# Altium PCB 多通道.PcbDoc (part 4 of 4)
Units mm, origin at the board's own origin, x right, y up, seen from the top; angles counter-clockwise.
Board outline 145 x 32 mm, 2 copper layers (Top Layer, Bottom Layer); 175 components, 157 nets, 554 pads, 195 vias.
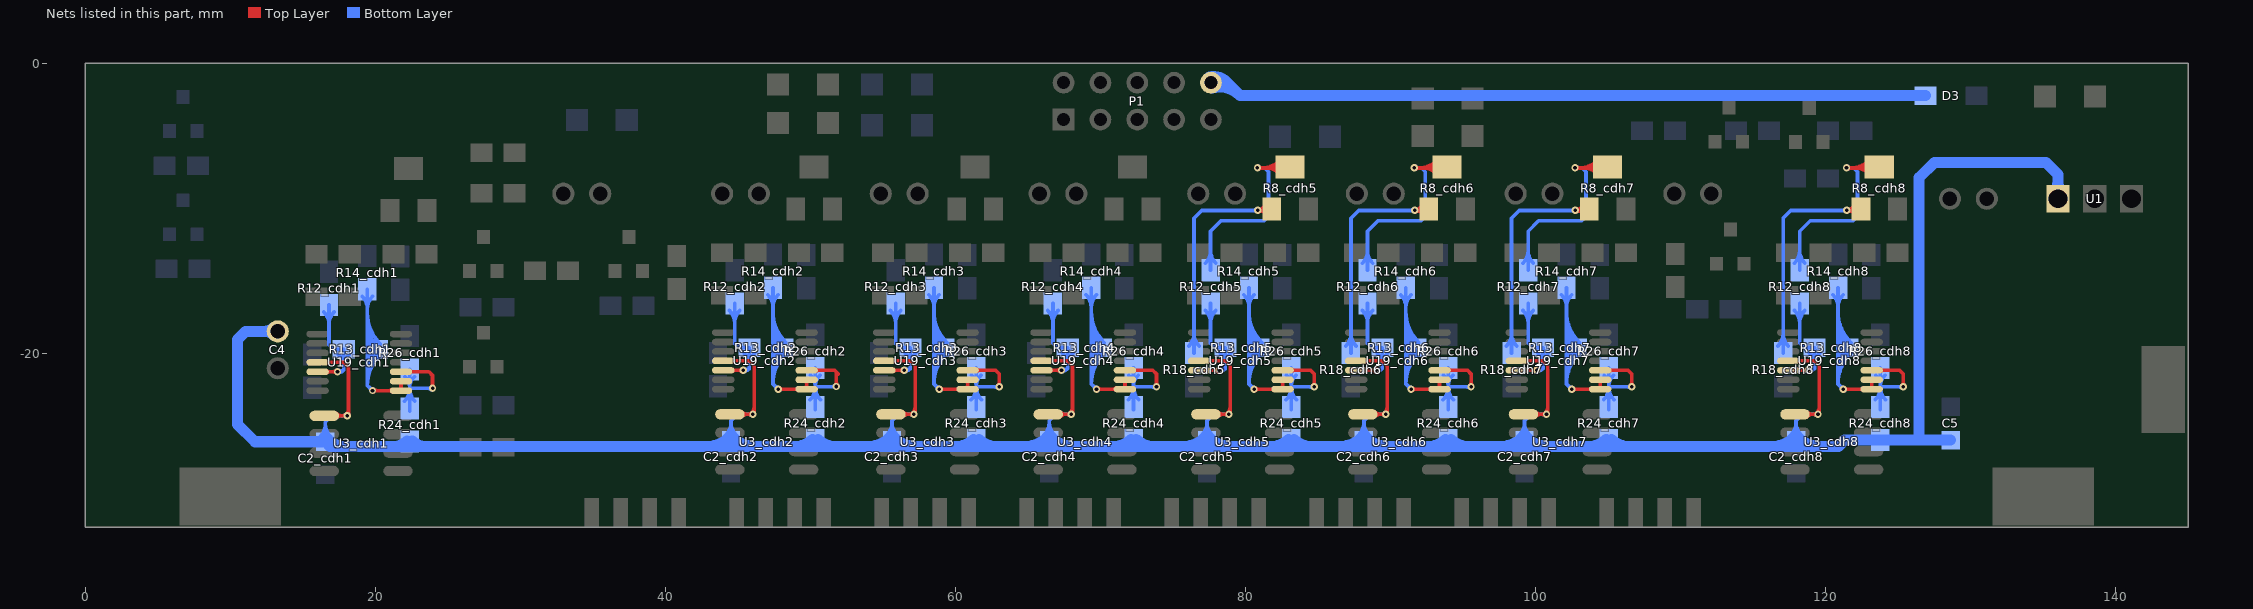
[diagram p4: the nets of this part, all layers, seen from the top]

## Via types
v1: diameter 0.5, hole 0.25, Top Layer to Bottom Layer, 192 vias
v2: diameter 3.1, hole 3.1, Top Layer to Bottom Layer, 3 vias

## Nets (pads, with @x,y where several pads share a name; then routed paths per layer and width w, separated by ;. In a path a pad name is that pad's centre, name@x,y a point inside that pad or via, vN(x,y) a via of type N, cw(c..) or ccw(c..) an arc to the next point about the centre after c; other vN are vias at no path point) (continued)
NetR8_cdh5_2: R8_cdh5.2 R18_cdh5.2 | length 19.2
  Top Layer w0.254: v1@80.903,-10.241 cw(c81.062,-10.515) 81.144,-10.209 ; v1@80.903,-10.028 ccw(c81.042,-9.788) 81.114,-10.056 ; v1@80.929,-10.222 cw(c81.153,-10.446) 81.153,-10.129 ; v1@80.929,-10.048 ccw(c81.124,-9.852) 81.124,-10.129 ; v1@80.948,-10.073 ccw(c81.188,-9.935) 81.117,-10.202 ; v1@80.949,-10.194 cw(c81.21,-10.338) 81.133,-10.051 ; R8_cdh5.2@81.252,-10.078 81.202,-10.129 v1@80.842,-10.129 ; R8_cdh5.2@81.342,-9.824 cw(c80.842,-9.566) v1@80.842,-10.129 ; R8_cdh5.2@81.402,-10.394 ccw(c80.842,-10.853) v1@80.842,-10.129
  Bottom Layer w0.254: R18_cdh5.2@76.088,-19.504 ccw(c75.221,-18.636) 76.448,-18.636 ccw(c77.674,-18.636) R18_cdh5.2@76.807,-19.504 ; R18_cdh5.2@76.448,-19.99 76.448,-10.693 76.981,-10.16 80.816,-10.16 v1(80.842,-10.135) ; 80.484,-10.16 ccw(c80.484,-9.776) v1@80.755,-10.048
NetR8_cdh5_3: R8_cdh5.3 R12_cdh5.1 | length 19.8
  Top Layer w0.254: v1@80.816,-7.229 82.472,-7.229 R8_cdh5.3@82.522,-7.178 ; v1@80.903,-7.301 cw(c81.077,-7.474) 81.077,-7.229 ; v1@80.903,-7.127 ccw(c81.15,-6.88) 81.15,-7.229 ; 81.093,-7.229 ccw(c81.093,-5.379) R8_cdh5.3@82.401,-6.687 ; 81.411,-7.229 cw(c81.411,-8.629) R8_cdh5.3@82.401,-7.639 ; 81.707,-7.229 ccw(c81.707,-5.992) R8_cdh5.3@82.581,-6.867 ; 82.024,-7.229 cw(c82.024,-8.015) R8_cdh5.3@82.581,-7.459
  Bottom Layer w0.254: R12_cdh5.1@77.231,-13.789 ccw(c76.364,-12.921) 77.591,-12.921 ccw(c78.817,-12.921) R12_cdh5.1@77.95,-13.789 ; R12_cdh5.1@77.591,-14.275 77.591,-11.582 78.312,-10.861 81.284,-10.861 81.578,-10.566 81.578,-7.493 81.299,-7.214 v1(80.816,-7.214) ; v1@80.903,-7.301 cw(c81.113,-7.511) 81.113,-7.214 cw(c81.113,-6.917) v1@80.903,-7.127
NetR8_cdh6_2: R8_cdh6.2 R18_cdh6.2 | length 19.2
  Top Layer w0.254: v1@91.724,-10.241 cw(c91.882,-10.515) 91.964,-10.209 ; v1@91.724,-10.028 ccw(c91.862,-9.788) 91.934,-10.056 ; v1@91.749,-10.222 cw(c91.974,-10.446) 91.974,-10.129 ; v1@91.749,-10.048 ccw(c91.945,-9.852) 91.945,-10.129 ; v1@91.769,-10.073 ccw(c92.009,-9.935) 91.937,-10.202 ; v1@91.77,-10.194 cw(c92.03,-10.338) 91.953,-10.051 ; R8_cdh6.2@92.073,-10.078 92.022,-10.129 v1@91.662,-10.129 ; R8_cdh6.2@92.162,-9.824 cw(c91.662,-9.566) v1@91.662,-10.129 ; R8_cdh6.2@92.223,-10.394 ccw(c91.662,-10.853) v1@91.662,-10.129
  Bottom Layer w0.254: R18_cdh6.2@86.909,-19.504 ccw(c86.042,-18.636) 87.268,-18.636 ccw(c88.494,-18.636) R18_cdh6.2@87.627,-19.504 ; R18_cdh6.2@87.268,-19.99 87.268,-10.693 87.801,-10.16 91.637,-10.16 v1(91.662,-10.135) ; 91.304,-10.16 ccw(c91.304,-9.776) v1@91.575,-10.048
NetR8_cdh6_3: R8_cdh6.3 R12_cdh6.1 | length 19.8
  Top Layer w0.254: v1@91.637,-7.229 93.292,-7.229 R8_cdh6.3@93.343,-7.178 ; v1@91.724,-7.301 cw(c91.898,-7.474) 91.898,-7.229 ; v1@91.724,-7.127 ccw(c91.97,-6.88) 91.97,-7.229 ; 91.914,-7.229 ccw(c91.914,-5.379) R8_cdh6.3@93.222,-6.687 ; 92.231,-7.229 cw(c92.231,-8.629) R8_cdh6.3@93.222,-7.639 ; 92.527,-7.229 ccw(c92.527,-5.992) R8_cdh6.3@93.401,-6.867 ; 92.845,-7.229 cw(c92.845,-8.015) R8_cdh6.3@93.401,-7.459
  Bottom Layer w0.254: R12_cdh6.1@88.052,-13.789 ccw(c87.185,-12.921) 88.411,-12.921 ccw(c89.637,-12.921) R12_cdh6.1@88.77,-13.789 ; R12_cdh6.1@88.411,-14.275 88.411,-11.582 89.133,-10.861 92.104,-10.861 92.399,-10.566 92.399,-7.493 92.119,-7.214 v1(91.637,-7.214) ; v1@91.724,-7.301 cw(c91.934,-7.511) 91.934,-7.214 cw(c91.934,-6.917) v1@91.724,-7.127
NetR8_cdh7_2: R8_cdh7.2 R18_cdh7.2 | length 19.2
  Top Layer w0.254: v1@102.798,-10.241 cw(c102.956,-10.515) 103.038,-10.209 ; v1@102.798,-10.028 ccw(c102.937,-9.788) 103.008,-10.056 ; v1@102.824,-10.222 cw(c103.048,-10.446) 103.048,-10.129 ; v1@102.824,-10.048 ccw(c103.019,-9.852) 103.019,-10.129 ; v1@102.843,-10.073 ccw(c103.083,-9.935) 103.011,-10.202 ; v1@102.844,-10.194 cw(c103.104,-10.338) 103.028,-10.051 ; R8_cdh7.2@103.147,-10.078 103.096,-10.129 v1@102.737,-10.129 ; R8_cdh7.2@103.237,-9.824 cw(c102.737,-9.566) v1@102.737,-10.129 ; R8_cdh7.2@103.297,-10.394 ccw(c102.737,-10.853) v1@102.737,-10.129
  Bottom Layer w0.254: R18_cdh7.2@97.983,-19.504 ccw(c97.116,-18.636) 98.342,-18.636 ccw(c99.569,-18.636) R18_cdh7.2@98.702,-19.504 ; R18_cdh7.2@98.342,-19.99 98.342,-10.693 98.876,-10.16 102.711,-10.16 v1(102.737,-10.135) ; 102.378,-10.16 ccw(c102.378,-9.776) v1@102.65,-10.048
NetR8_cdh7_3: R8_cdh7.3 R12_cdh7.1 | length 19.8
  Top Layer w0.254: v1@102.711,-7.229 104.366,-7.229 R8_cdh7.3@104.417,-7.178 ; v1@102.798,-7.301 cw(c102.972,-7.474) 102.972,-7.229 ; v1@102.798,-7.127 ccw(c103.044,-6.88) 103.044,-7.229 ; 102.988,-7.229 ccw(c102.988,-5.379) R8_cdh7.3@104.296,-6.687 ; 103.306,-7.229 cw(c103.306,-8.629) R8_cdh7.3@104.296,-7.639 ; 103.601,-7.229 ccw(c103.601,-5.992) R8_cdh7.3@104.476,-6.867 ; 103.919,-7.229 cw(c103.919,-8.015) R8_cdh7.3@104.476,-7.459
  Bottom Layer w0.254: R12_cdh7.1@99.126,-13.789 ccw(c98.259,-12.921) 99.485,-12.921 ccw(c100.712,-12.921) R12_cdh7.1@99.845,-13.789 ; R12_cdh7.1@99.485,-14.275 99.485,-11.582 100.207,-10.861 103.179,-10.861 103.473,-10.566 103.473,-7.493 103.194,-7.214 v1(102.711,-7.214) ; v1@102.798,-7.301 cw(c103.008,-7.511) 103.008,-7.214 cw(c103.008,-6.917) v1@102.798,-7.127
NetR8_cdh8_2: R8_cdh8.2 R18_cdh8.2 | length 19.2
  Top Layer w0.254: v1@121.518,-10.241 cw(c121.676,-10.515) 121.758,-10.209 ; v1@121.518,-10.028 ccw(c121.656,-9.788) 121.728,-10.056 ; v1@121.543,-10.222 cw(c121.768,-10.446) 121.768,-10.129 ; v1@121.543,-10.048 ccw(c121.739,-9.852) 121.739,-10.129 ; v1@121.563,-10.073 ccw(c121.803,-9.935) 121.731,-10.202 ; v1@121.564,-10.194 cw(c121.824,-10.338) 121.747,-10.051 ; R8_cdh8.2@121.867,-10.078 121.816,-10.129 v1@121.456,-10.129 ; R8_cdh8.2@121.957,-9.824 cw(c121.456,-9.566) v1@121.456,-10.129 ; R8_cdh8.2@122.017,-10.394 ccw(c121.456,-10.853) v1@121.456,-10.129
  Bottom Layer w0.254: R18_cdh8.2@116.703,-19.504 ccw(c115.836,-18.636) 117.062,-18.636 ccw(c118.289,-18.636) R18_cdh8.2@117.421,-19.504 ; R18_cdh8.2@117.062,-19.99 117.062,-10.693 117.596,-10.16 121.431,-10.16 v1(121.456,-10.135) ; 121.098,-10.16 ccw(c121.098,-9.776) v1@121.369,-10.048
NetR8_cdh8_3: R8_cdh8.3 R12_cdh8.1 | length 19.8
  Top Layer w0.254: v1@121.431,-7.229 123.086,-7.229 R8_cdh8.3@123.137,-7.178 ; v1@121.518,-7.301 cw(c121.692,-7.474) 121.692,-7.229 ; v1@121.518,-7.127 ccw(c121.764,-6.88) 121.764,-7.229 ; 121.708,-7.229 ccw(c121.708,-5.379) R8_cdh8.3@123.016,-6.687 ; 122.026,-7.229 cw(c122.026,-8.629) R8_cdh8.3@123.016,-7.639 ; 122.321,-7.229 ccw(c122.321,-5.992) R8_cdh8.3@123.195,-6.867 ; 122.639,-7.229 cw(c122.639,-8.015) R8_cdh8.3@123.195,-7.459
  Bottom Layer w0.254: R12_cdh8.1@117.846,-13.789 ccw(c116.979,-12.921) 118.205,-12.921 ccw(c119.432,-12.921) R12_cdh8.1@118.564,-13.789 ; R12_cdh8.1@118.205,-14.275 118.205,-11.582 118.927,-10.861 121.899,-10.861 122.193,-10.566 122.193,-7.493 121.914,-7.214 v1(121.431,-7.214) ; v1@121.518,-7.301 cw(c121.728,-7.511) 121.728,-7.214 cw(c121.728,-6.917) v1@121.518,-7.127
NetR12_cdh1_2: R12_cdh1.2 R13_cdh1.1 U19_cdh1.5 | length 12.7
  Top Layer w0.254: U19_cdh1.5@16.023,-21.275 v1(17.397,-21.275) ; U19_cdh1.5@16.642,-21.344 cw(c16.81,-21.511) 16.81,-21.275 cw(c16.81,-21.038) U19_cdh1.5@16.642,-21.206 ; v1@17.31,-21.362 ccw(c17.1,-21.572) 17.1,-21.275 ccw(c17.1,-20.978) v1@17.31,-21.188
  Bottom Layer w0.254: R12_cdh1.2@16.449,-17.149 cw(c15.582,-18.016) 16.808,-18.016 cw(c18.035,-18.016) R12_cdh1.2@17.168,-17.149 ; R12_cdh1.2@16.808,-16.662 16.808,-19.406 17.128,-19.725 R13_cdh1.1@17.829,-19.725 17.829,-21.148 ; v1(17.397,-21.275) 17.702,-21.275 17.829,-21.148 ; v1@17.469,-21.176 ccw(c17.633,-20.952) 17.829,-21.148 ; R13_cdh1.1@17.469,-20.085 cw(c16.602,-20.952) 17.829,-20.952 cw(c19.055,-20.952) R13_cdh1.1@18.188,-20.085 ; v1@17.484,-21.362 cw(c17.694,-21.572) 17.694,-21.275 cw(c17.694,-20.978) v1@17.484,-21.188
NetR12_cdh2_2: R12_cdh2.2 R13_cdh2.1 U19_cdh2.5 | length 12.7
  Top Layer w0.254: U19_cdh2.5@43.989,-21.173 v1(45.362,-21.173) ; U19_cdh2.5@44.608,-21.242 cw(c44.775,-21.41) 44.775,-21.173 cw(c44.775,-20.937) U19_cdh2.5@44.608,-21.104 ; v1@45.275,-21.26 ccw(c45.065,-21.47) 45.065,-21.173 ccw(c45.065,-20.876) v1@45.275,-21.086
  Bottom Layer w0.254: R12_cdh2.2@44.415,-17.047 cw(c43.547,-17.914) 44.774,-17.914 cw(c46,-17.914) R12_cdh2.2@45.133,-17.047 ; R12_cdh2.2@44.774,-16.561 44.774,-19.304 45.094,-19.624 R13_cdh2.1@45.794,-19.624 45.794,-21.046 ; v1(45.362,-21.173) 45.667,-21.173 45.794,-21.046 ; v1@45.435,-21.074 ccw(c45.598,-20.85) 45.794,-21.046 ; R13_cdh2.1@45.435,-19.983 cw(c44.568,-20.85) 45.794,-20.85 cw(c47.02,-20.85) R13_cdh2.1@46.153,-19.983 ; v1@45.449,-21.26 cw(c45.659,-21.47) 45.659,-21.173 cw(c45.659,-20.876) v1@45.449,-21.086
NetR12_cdh3_2: R12_cdh3.2 R13_cdh3.1 U19_cdh3.5 | length 12.7
  Top Layer w0.254: U19_cdh3.5@55.088,-21.173 v1(56.462,-21.173) ; U19_cdh3.5@55.708,-21.242 cw(c55.875,-21.41) 55.875,-21.173 cw(c55.875,-20.937) U19_cdh3.5@55.708,-21.104 ; v1@56.375,-21.26 ccw(c56.165,-21.47) 56.165,-21.173 ccw(c56.165,-20.876) v1@56.375,-21.086
  Bottom Layer w0.254: R12_cdh3.2@55.514,-17.047 cw(c54.647,-17.914) 55.874,-17.914 cw(c57.1,-17.914) R12_cdh3.2@56.233,-17.047 ; R12_cdh3.2@55.874,-16.561 55.874,-19.304 56.193,-19.624 R13_cdh3.1@56.894,-19.624 56.894,-21.046 ; v1(56.462,-21.173) 56.767,-21.173 56.894,-21.046 ; v1@56.535,-21.074 ccw(c56.698,-20.85) 56.894,-21.046 ; R13_cdh3.1@56.535,-19.983 cw(c55.667,-20.85) 56.894,-20.85 cw(c58.12,-20.85) R13_cdh3.1@57.253,-19.983 ; v1@56.549,-21.26 cw(c56.759,-21.47) 56.759,-21.173 cw(c56.759,-20.876) v1@56.549,-21.086
NetR12_cdh4_2: R12_cdh4.2 R13_cdh4.1 U19_cdh4.5 | length 12.7
  Top Layer w0.254: U19_cdh4.5@65.934,-21.173 v1(67.308,-21.173) ; U19_cdh4.5@66.553,-21.242 cw(c66.721,-21.41) 66.721,-21.173 cw(c66.721,-20.937) U19_cdh4.5@66.553,-21.104 ; v1@67.221,-21.26 ccw(c67.011,-21.47) 67.011,-21.173 ccw(c67.011,-20.876) v1@67.221,-21.086
  Bottom Layer w0.254: R12_cdh4.2@66.36,-17.047 cw(c65.493,-17.914) 66.719,-17.914 cw(c67.946,-17.914) R12_cdh4.2@67.079,-17.047 ; R12_cdh4.2@66.719,-16.561 66.719,-19.304 67.039,-19.624 R13_cdh4.1@67.74,-19.624 67.74,-21.046 ; v1(67.308,-21.173) 67.613,-21.173 67.74,-21.046 ; v1@67.38,-21.074 ccw(c67.544,-20.85) 67.74,-21.046 ; R13_cdh4.1@67.38,-19.983 cw(c66.513,-20.85) 67.74,-20.85 cw(c68.966,-20.85) R13_cdh4.1@68.099,-19.983 ; v1@67.395,-21.26 cw(c67.605,-21.47) 67.605,-21.173 cw(c67.605,-20.876) v1@67.395,-21.086
NetR12_cdh5_2: R12_cdh5.2 R13_cdh5.1 U19_cdh5.5 | length 12.7
  Top Layer w0.254: U19_cdh5.5@76.805,-21.173 v1(78.179,-21.173) ; U19_cdh5.5@77.425,-21.242 cw(c77.592,-21.41) 77.592,-21.173 cw(c77.592,-20.937) U19_cdh5.5@77.425,-21.104 ; v1@78.092,-21.26 ccw(c77.882,-21.47) 77.882,-21.173 ccw(c77.882,-20.876) v1@78.092,-21.086
  Bottom Layer w0.254: R12_cdh5.2@77.231,-17.047 cw(c76.364,-17.914) 77.591,-17.914 cw(c78.817,-17.914) R12_cdh5.2@77.95,-17.047 ; R12_cdh5.2@77.591,-16.561 77.591,-19.304 77.91,-19.624 R13_cdh5.1@78.611,-19.624 78.611,-21.046 ; v1(78.179,-21.173) 78.484,-21.173 78.611,-21.046 ; v1@78.252,-21.074 ccw(c78.415,-20.85) 78.611,-21.046 ; R13_cdh5.1@78.252,-19.983 cw(c77.384,-20.85) 78.611,-20.85 cw(c79.837,-20.85) R13_cdh5.1@78.97,-19.983 ; v1@78.266,-21.26 cw(c78.476,-21.47) 78.476,-21.173 cw(c78.476,-20.876) v1@78.266,-21.086
NetR12_cdh6_2: R12_cdh6.2 R13_cdh6.1 U19_cdh6.5 | length 12.7
  Top Layer w0.254: U19_cdh6.5@87.626,-21.173 v1(88.999,-21.173) ; U19_cdh6.5@88.245,-21.242 cw(c88.412,-21.41) 88.412,-21.173 cw(c88.412,-20.937) U19_cdh6.5@88.245,-21.104 ; v1@88.912,-21.26 ccw(c88.702,-21.47) 88.702,-21.173 ccw(c88.702,-20.876) v1@88.912,-21.086
  Bottom Layer w0.254: R12_cdh6.2@88.052,-17.047 cw(c87.185,-17.914) 88.411,-17.914 cw(c89.637,-17.914) R12_cdh6.2@88.77,-17.047 ; R12_cdh6.2@88.411,-16.561 88.411,-19.304 88.731,-19.624 R13_cdh6.1@89.431,-19.624 89.431,-21.046 ; v1(88.999,-21.173) 89.304,-21.173 89.431,-21.046 ; v1@89.072,-21.074 ccw(c89.235,-20.85) 89.431,-21.046 ; R13_cdh6.1@89.072,-19.983 cw(c88.205,-20.85) 89.431,-20.85 cw(c90.658,-20.85) R13_cdh6.1@89.79,-19.983 ; v1@89.086,-21.26 cw(c89.296,-21.47) 89.296,-21.173 cw(c89.296,-20.876) v1@89.086,-21.086
NetR12_cdh7_2: R12_cdh7.2 R13_cdh7.1 U19_cdh7.5 | length 12.7
  Top Layer w0.254: U19_cdh7.5@98.7,-21.173 v1(100.074,-21.173) ; U19_cdh7.5@99.319,-21.242 cw(c99.487,-21.41) 99.487,-21.173 cw(c99.487,-20.937) U19_cdh7.5@99.319,-21.104 ; v1@99.987,-21.26 ccw(c99.777,-21.47) 99.777,-21.173 ccw(c99.777,-20.876) v1@99.987,-21.086
  Bottom Layer w0.254: R12_cdh7.2@99.126,-17.047 cw(c98.259,-17.914) 99.485,-17.914 cw(c100.712,-17.914) R12_cdh7.2@99.845,-17.047 ; R12_cdh7.2@99.485,-16.561 99.485,-19.304 99.805,-19.624 R13_cdh7.1@100.506,-19.624 100.506,-21.046 ; v1(100.074,-21.173) 100.379,-21.173 100.506,-21.046 ; v1@100.146,-21.074 ccw(c100.31,-20.85) 100.506,-21.046 ; R13_cdh7.1@100.146,-19.983 cw(c99.279,-20.85) 100.506,-20.85 cw(c101.732,-20.85) R13_cdh7.1@100.865,-19.983 ; v1@100.161,-21.26 cw(c100.371,-21.47) 100.371,-21.173 cw(c100.371,-20.876) v1@100.161,-21.086
NetR12_cdh8_2: R12_cdh8.2 R13_cdh8.1 U19_cdh8.5 | length 12.7
  Top Layer w0.254: U19_cdh8.5@117.42,-21.173 v1(118.794,-21.173) ; U19_cdh8.5@118.039,-21.242 cw(c118.207,-21.41) 118.207,-21.173 cw(c118.207,-20.937) U19_cdh8.5@118.039,-21.104 ; v1@118.707,-21.26 ccw(c118.497,-21.47) 118.497,-21.173 ccw(c118.497,-20.876) v1@118.707,-21.086
  Bottom Layer w0.254: R12_cdh8.2@117.846,-17.047 cw(c116.979,-17.914) 118.205,-17.914 cw(c119.432,-17.914) R12_cdh8.2@118.564,-17.047 ; R12_cdh8.2@118.205,-16.561 118.205,-19.304 118.525,-19.624 R13_cdh8.1@119.225,-19.624 119.225,-21.046 ; v1(118.794,-21.173) 119.098,-21.173 119.225,-21.046 ; v1@118.866,-21.074 ccw(c119.03,-20.85) 119.225,-21.046 ; R13_cdh8.1@118.866,-19.983 cw(c117.999,-20.85) 119.225,-20.85 cw(c120.452,-20.85) R13_cdh8.1@119.585,-19.983 ; v1@118.881,-21.26 cw(c119.091,-21.47) 119.091,-21.173 cw(c119.091,-20.876) v1@118.881,-21.086
NetR13_cdh1_2: R13_cdh1.2 R14_cdh1.2 U19_cdh1.8 U19_cdh1.9 | length 27.2
  Top Layer w0.254: v1@19.784,-22.57 19.789,-22.575 v1(19.81,-22.575) U19_cdh1.8@21.773,-22.575 U19_cdh1.9@21.773,-21.925 21.773,-21.914 U19_cdh1.9@21.74,-21.881 ; v1@19.897,-22.662 cw(c20.107,-22.872) 20.107,-22.575 cw(c20.107,-22.278) v1@19.897,-22.488 ; U19_cdh1.8@21.154,-22.644 ccw(c20.987,-22.811) 20.987,-22.575 ccw(c20.987,-22.338) U19_cdh1.8@21.154,-22.506 ; U19_cdh1.8@21.704,-22.506 ccw(c21.537,-22.338) 21.773,-22.338 ccw(c22.01,-22.338) U19_cdh1.8@21.842,-22.506 ; U19_cdh1.9@21.704,-21.994 cw(c21.537,-22.161) 21.773,-22.161 cw(c22.01,-22.161) U19_cdh1.9@21.842,-21.994
  Bottom Layer w0.254: R14_cdh1.2@19.095,-16.071 cw(c18.228,-16.939) 19.454,-16.939 cw(c20.681,-16.939) R14_cdh1.2@19.813,-16.071 ; 19.454,-22.24 cw(c22.502,-22.24) R13_cdh1.2@20.347,-20.085 ; 19.454,-21.626 cw(c21.889,-21.626) R13_cdh1.2@20.167,-19.905 ; 19.454,-21.013 cw(c21.275,-21.013) 19.988,-19.725 cw(c21.275,-18.438) 19.454,-18.438 ; 19.454,-20.4 cw(c20.662,-20.4) R13_cdh1.2@19.808,-19.546 ; 19.454,-19.051 ccw(c20.662,-19.051) R13_cdh1.2@19.808,-19.905 ; 19.454,-17.824 ccw(c21.889,-17.824) R13_cdh1.2@20.167,-19.546 ; 19.454,-17.211 ccw(c22.502,-17.211) R13_cdh1.2@20.347,-19.366 ; R14_cdh1.2@19.454,-15.585 19.454,-19.725 19.454,-22.219 v1(19.81,-22.575) ; v1@19.687,-22.575 ccw(c19.39,-22.575) 19.6,-22.365 ccw(c19.81,-22.155) v1@19.81,-22.452
NetR13_cdh2_2: R13_cdh2.2 R14_cdh2.2 U19_cdh2.8 U19_cdh2.9 | length 27.2
  Top Layer w0.254: v1@47.75,-22.469 47.754,-22.473 v1(47.775,-22.473) U19_cdh2.8@49.739,-22.473 U19_cdh2.9@49.739,-21.823 49.739,-21.812 U19_cdh2.9@49.706,-21.779 ; v1@47.862,-22.56 cw(c48.072,-22.77) 48.072,-22.473 cw(c48.072,-22.176) v1@47.862,-22.386 ; U19_cdh2.8@49.119,-22.542 ccw(c48.952,-22.71) 48.952,-22.473 ccw(c48.952,-22.237) U19_cdh2.8@49.119,-22.404 ; U19_cdh2.8@49.669,-22.404 ccw(c49.502,-22.237) 49.739,-22.237 ccw(c49.975,-22.237) U19_cdh2.8@49.808,-22.404 ; U19_cdh2.9@49.669,-21.892 cw(c49.502,-22.06) 49.739,-22.06 cw(c49.975,-22.06) U19_cdh2.9@49.808,-21.892
  Bottom Layer w0.254: R14_cdh2.2@47.06,-15.97 cw(c46.193,-16.837) 47.42,-16.837 cw(c48.646,-16.837) R14_cdh2.2@47.779,-15.97 ; 47.42,-22.138 cw(c50.467,-22.138) R13_cdh2.2@48.312,-19.983 ; 47.42,-21.525 cw(c49.854,-21.525) R13_cdh2.2@48.133,-19.803 ; 47.42,-20.912 cw(c49.241,-20.912) 47.953,-19.624 cw(c49.241,-18.336) 47.42,-18.336 ; 47.42,-20.298 cw(c48.628,-20.298) R13_cdh2.2@47.773,-19.444 ; 47.42,-18.949 ccw(c48.628,-18.949) R13_cdh2.2@47.773,-19.803 ; 47.42,-17.723 ccw(c49.854,-17.723) R13_cdh2.2@48.133,-19.444 ; 47.42,-17.11 ccw(c50.467,-17.11) R13_cdh2.2@48.312,-19.265 ; R14_cdh2.2@47.42,-15.484 47.42,-19.624 47.42,-22.118 v1(47.775,-22.473) ; v1@47.652,-22.473 ccw(c47.355,-22.473) 47.565,-22.263 ccw(c47.775,-22.053) v1@47.775,-22.35
NetR13_cdh3_2: R13_cdh3.2 R14_cdh3.2 U19_cdh3.8 U19_cdh3.9 | length 27.2
  Top Layer w0.254: v1@58.85,-22.469 58.854,-22.473 v1(58.875,-22.473) U19_cdh3.8@60.838,-22.473 U19_cdh3.9@60.838,-21.823 60.838,-21.812 U19_cdh3.9@60.805,-21.779 ; v1@58.962,-22.56 cw(c59.172,-22.77) 59.172,-22.473 cw(c59.172,-22.176) v1@58.962,-22.386 ; U19_cdh3.8@60.219,-22.542 ccw(c60.052,-22.71) 60.052,-22.473 ccw(c60.052,-22.237) U19_cdh3.8@60.219,-22.404 ; U19_cdh3.8@60.769,-22.404 ccw(c60.602,-22.237) 60.838,-22.237 ccw(c61.075,-22.237) U19_cdh3.8@60.908,-22.404 ; U19_cdh3.9@60.769,-21.892 cw(c60.602,-22.06) 60.838,-22.06 cw(c61.075,-22.06) U19_cdh3.9@60.908,-21.892
  Bottom Layer w0.254: R14_cdh3.2@58.16,-15.97 cw(c57.293,-16.837) 58.519,-16.837 cw(c59.746,-16.837) R14_cdh3.2@58.879,-15.97 ; 58.519,-22.138 cw(c61.567,-22.138) R13_cdh3.2@59.412,-19.983 ; 58.519,-21.525 cw(c60.954,-21.525) R13_cdh3.2@59.232,-19.803 ; 58.519,-20.912 cw(c60.341,-20.912) 59.053,-19.624 cw(c60.341,-18.336) 58.519,-18.336 ; 58.519,-20.298 cw(c59.727,-20.298) R13_cdh3.2@58.873,-19.444 ; 58.519,-18.949 ccw(c59.727,-18.949) R13_cdh3.2@58.873,-19.803 ; 58.519,-17.723 ccw(c60.954,-17.723) R13_cdh3.2@59.232,-19.444 ; 58.519,-17.11 ccw(c61.567,-17.11) R13_cdh3.2@59.412,-19.265 ; R14_cdh3.2@58.519,-15.484 58.519,-19.624 58.519,-22.118 v1(58.875,-22.473) ; v1@58.752,-22.473 ccw(c58.455,-22.473) 58.665,-22.263 ccw(c58.875,-22.053) v1@58.875,-22.35
NetR13_cdh4_2: R13_cdh4.2 R14_cdh4.2 U19_cdh4.8 U19_cdh4.9 | length 27.2
  Top Layer w0.254: v1@69.695,-22.469 69.7,-22.473 v1(69.721,-22.473) U19_cdh4.8@71.684,-22.473 U19_cdh4.9@71.684,-21.823 71.684,-21.812 U19_cdh4.9@71.651,-21.779 ; v1@69.808,-22.56 cw(c70.018,-22.77) 70.018,-22.473 cw(c70.018,-22.176) v1@69.808,-22.386 ; U19_cdh4.8@71.065,-22.542 ccw(c70.898,-22.71) 70.898,-22.473 ccw(c70.898,-22.237) U19_cdh4.8@71.065,-22.404 ; U19_cdh4.8@71.615,-22.404 ccw(c71.448,-22.237) 71.684,-22.237 ccw(c71.921,-22.237) U19_cdh4.8@71.753,-22.404 ; U19_cdh4.9@71.615,-21.892 cw(c71.448,-22.06) 71.684,-22.06 cw(c71.921,-22.06) U19_cdh4.9@71.753,-21.892
  Bottom Layer w0.254: R14_cdh4.2@69.006,-15.97 cw(c68.139,-16.837) 69.365,-16.837 cw(c70.592,-16.837) R14_cdh4.2@69.724,-15.97 ; 69.365,-22.138 cw(c72.413,-22.138) R13_cdh4.2@70.258,-19.983 ; 69.365,-21.525 cw(c71.8,-21.525) R13_cdh4.2@70.078,-19.803 ; 69.365,-20.912 cw(c71.186,-20.912) 69.899,-19.624 cw(c71.186,-18.336) 69.365,-18.336 ; 69.365,-20.298 cw(c70.573,-20.298) R13_cdh4.2@69.719,-19.444 ; 69.365,-18.949 ccw(c70.573,-18.949) R13_cdh4.2@69.719,-19.803 ; 69.365,-17.723 ccw(c71.8,-17.723) R13_cdh4.2@70.078,-19.444 ; 69.365,-17.11 ccw(c72.413,-17.11) R13_cdh4.2@70.258,-19.265 ; R14_cdh4.2@69.365,-15.484 69.365,-19.624 69.365,-22.118 v1(69.721,-22.473) ; v1@69.598,-22.473 ccw(c69.301,-22.473) 69.511,-22.263 ccw(c69.721,-22.053) v1@69.721,-22.35
NetR13_cdh5_2: R13_cdh5.2 R14_cdh5.2 U19_cdh5.8 U19_cdh5.9 | length 27.2
  Top Layer w0.254: v1@80.567,-22.469 80.571,-22.473 v1(80.592,-22.473) U19_cdh5.8@82.555,-22.473 U19_cdh5.9@82.555,-21.823 82.555,-21.812 U19_cdh5.9@82.522,-21.779 ; v1@80.679,-22.56 cw(c80.889,-22.77) 80.889,-22.473 cw(c80.889,-22.176) v1@80.679,-22.386 ; U19_cdh5.8@81.936,-22.542 ccw(c81.769,-22.71) 81.769,-22.473 ccw(c81.769,-22.237) U19_cdh5.8@81.936,-22.404 ; U19_cdh5.8@82.486,-22.404 ccw(c82.319,-22.237) 82.555,-22.237 ccw(c82.792,-22.237) U19_cdh5.8@82.625,-22.404 ; U19_cdh5.9@82.486,-21.892 cw(c82.319,-22.06) 82.555,-22.06 cw(c82.792,-22.06) U19_cdh5.9@82.625,-21.892
  Bottom Layer w0.254: R14_cdh5.2@79.877,-15.97 cw(c79.01,-16.837) 80.236,-16.837 cw(c81.463,-16.837) R14_cdh5.2@80.596,-15.97 ; 80.236,-22.138 cw(c83.284,-22.138) R13_cdh5.2@81.129,-19.983 ; 80.236,-21.525 cw(c82.671,-21.525) R13_cdh5.2@80.949,-19.803 ; 80.236,-20.912 cw(c82.058,-20.912) 80.77,-19.624 cw(c82.058,-18.336) 80.236,-18.336 ; 80.236,-20.298 cw(c81.444,-20.298) R13_cdh5.2@80.59,-19.444 ; 80.236,-18.949 ccw(c81.444,-18.949) R13_cdh5.2@80.59,-19.803 ; 80.236,-17.723 ccw(c82.671,-17.723) R13_cdh5.2@80.949,-19.444 ; 80.236,-17.11 ccw(c83.284,-17.11) R13_cdh5.2@81.129,-19.265 ; R14_cdh5.2@80.236,-15.484 80.236,-19.624 80.236,-22.118 v1(80.592,-22.473) ; v1@80.469,-22.473 ccw(c80.172,-22.473) 80.382,-22.263 ccw(c80.592,-22.053) v1@80.592,-22.35
NetR13_cdh6_2: R13_cdh6.2 R14_cdh6.2 U19_cdh6.8 U19_cdh6.9 | length 27.2
  Top Layer w0.254: v1@91.387,-22.469 91.392,-22.473 v1(91.412,-22.473) U19_cdh6.8@93.376,-22.473 U19_cdh6.9@93.376,-21.823 93.376,-21.812 U19_cdh6.9@93.343,-21.779 ; v1@91.499,-22.56 cw(c91.709,-22.77) 91.709,-22.473 cw(c91.709,-22.176) v1@91.499,-22.386 ; U19_cdh6.8@92.757,-22.542 ccw(c92.589,-22.71) 92.589,-22.473 ccw(c92.589,-22.237) U19_cdh6.8@92.757,-22.404 ; U19_cdh6.8@93.307,-22.404 ccw(c93.139,-22.237) 93.376,-22.237 ccw(c93.612,-22.237) U19_cdh6.8@93.445,-22.404 ; U19_cdh6.9@93.307,-21.892 cw(c93.139,-22.06) 93.376,-22.06 cw(c93.612,-22.06) U19_cdh6.9@93.445,-21.892
  Bottom Layer w0.254: R14_cdh6.2@90.698,-15.97 cw(c89.83,-16.837) 91.057,-16.837 cw(c92.283,-16.837) R14_cdh6.2@91.416,-15.97 ; 91.057,-22.138 cw(c94.104,-22.138) R13_cdh6.2@91.949,-19.983 ; 91.057,-21.525 cw(c93.491,-21.525) R13_cdh6.2@91.77,-19.803 ; 91.057,-20.912 cw(c92.878,-20.912) 91.59,-19.624 cw(c92.878,-18.336) 91.057,-18.336 ; 91.057,-20.298 cw(c92.265,-20.298) R13_cdh6.2@91.411,-19.444 ; 91.057,-18.949 ccw(c92.265,-18.949) R13_cdh6.2@91.411,-19.803 ; 91.057,-17.723 ccw(c93.491,-17.723) R13_cdh6.2@91.77,-19.444 ; 91.057,-17.11 ccw(c94.104,-17.11) R13_cdh6.2@91.949,-19.265 ; R14_cdh6.2@91.057,-15.484 91.057,-19.624 91.057,-22.118 v1(91.412,-22.473) ; v1@91.289,-22.473 ccw(c90.992,-22.473) 91.202,-22.263 ccw(c91.412,-22.053) v1@91.412,-22.35
NetR13_cdh7_2: R13_cdh7.2 R14_cdh7.2 U19_cdh7.8 U19_cdh7.9 | length 27.2
  Top Layer w0.254: v1@102.461,-22.469 102.466,-22.473 v1(102.487,-22.473) U19_cdh7.8@104.45,-22.473 U19_cdh7.9@104.45,-21.823 104.45,-21.812 U19_cdh7.9@104.417,-21.779 ; v1@102.574,-22.56 cw(c102.784,-22.77) 102.784,-22.473 cw(c102.784,-22.176) v1@102.574,-22.386 ; U19_cdh7.8@103.831,-22.542 ccw(c103.664,-22.71) 103.664,-22.473 ccw(c103.664,-22.237) U19_cdh7.8@103.831,-22.404 ; U19_cdh7.8@104.381,-22.404 ccw(c104.214,-22.237) 104.45,-22.237 ccw(c104.687,-22.237) U19_cdh7.8@104.519,-22.404 ; U19_cdh7.9@104.381,-21.892 cw(c104.214,-22.06) 104.45,-22.06 cw(c104.687,-22.06) U19_cdh7.9@104.519,-21.892
  Bottom Layer w0.254: R14_cdh7.2@101.772,-15.97 cw(c100.905,-16.837) 102.131,-16.837 cw(c103.358,-16.837) R14_cdh7.2@102.49,-15.97 ; 102.131,-22.138 cw(c105.179,-22.138) R13_cdh7.2@103.024,-19.983 ; 102.131,-21.525 cw(c104.566,-21.525) R13_cdh7.2@102.844,-19.803 ; 102.131,-20.912 cw(c103.952,-20.912) 102.665,-19.624 cw(c103.952,-18.336) 102.131,-18.336 ; 102.131,-20.298 cw(c103.339,-20.298) R13_cdh7.2@102.485,-19.444 ; 102.131,-18.949 ccw(c103.339,-18.949) R13_cdh7.2@102.485,-19.803 ; 102.131,-17.723 ccw(c104.566,-17.723) R13_cdh7.2@102.844,-19.444 ; 102.131,-17.11 ccw(c105.179,-17.11) R13_cdh7.2@103.024,-19.265 ; R14_cdh7.2@102.131,-15.484 102.131,-19.624 102.131,-22.118 v1(102.487,-22.473) ; v1@102.364,-22.473 ccw(c102.067,-22.473) 102.277,-22.263 ccw(c102.487,-22.053) v1@102.487,-22.35
NetR13_cdh8_2: R13_cdh8.2 R14_cdh8.2 U19_cdh8.8 U19_cdh8.9 | length 27.2
  Top Layer w0.254: v1@121.181,-22.469 121.186,-22.473 v1(121.207,-22.473) U19_cdh8.8@123.17,-22.473 U19_cdh8.9@123.17,-21.823 123.17,-21.812 U19_cdh8.9@123.137,-21.779 ; v1@121.294,-22.56 cw(c121.504,-22.77) 121.504,-22.473 cw(c121.504,-22.176) v1@121.294,-22.386 ; U19_cdh8.8@122.551,-22.542 ccw(c122.383,-22.71) 122.383,-22.473 ccw(c122.383,-22.237) U19_cdh8.8@122.551,-22.404 ; U19_cdh8.8@123.101,-22.404 ccw(c122.933,-22.237) 123.17,-22.237 ccw(c123.407,-22.237) U19_cdh8.8@123.239,-22.404 ; U19_cdh8.9@123.101,-21.892 cw(c122.933,-22.06) 123.17,-22.06 cw(c123.407,-22.06) U19_cdh8.9@123.239,-21.892
  Bottom Layer w0.254: R14_cdh8.2@120.492,-15.97 cw(c119.625,-16.837) 120.851,-16.837 cw(c122.077,-16.837) R14_cdh8.2@121.21,-15.97 ; 120.851,-22.138 cw(c123.899,-22.138) R13_cdh8.2@121.744,-19.983 ; 120.851,-21.525 cw(c123.285,-21.525) R13_cdh8.2@121.564,-19.803 ; 120.851,-20.912 cw(c122.672,-20.912) 121.384,-19.624 cw(c122.672,-18.336) 120.851,-18.336 ; 120.851,-20.298 cw(c122.059,-20.298) R13_cdh8.2@121.205,-19.444 ; 120.851,-18.949 ccw(c122.059,-18.949) R13_cdh8.2@121.205,-19.803 ; 120.851,-17.723 ccw(c123.285,-17.723) R13_cdh8.2@121.564,-19.444 ; 120.851,-17.11 ccw(c123.899,-17.11) R13_cdh8.2@121.744,-19.265 ; R14_cdh8.2@120.851,-15.484 120.851,-19.624 120.851,-22.118 v1(121.207,-22.473) ; v1@121.084,-22.473 ccw(c120.787,-22.473) 120.997,-22.263 ccw(c121.207,-22.053) v1@121.207,-22.35
NetR24_cdh1_1: R24_cdh1.1 R26_cdh1.2 U19_cdh1.10 | length 12.5
  Top Layer w0.254: U19_cdh1.10@21.773,-21.275 23.696,-21.275 23.95,-21.529 v1(23.95,-22.418) ; U19_cdh1.10@22.392,-21.344 cw(c22.56,-21.511) 22.56,-21.275 cw(c22.56,-21.038) U19_cdh1.10@22.392,-21.206 ; v1@23.863,-22.331 ccw(c23.653,-22.121) 23.95,-22.121 ccw(c24.247,-22.121) v1@24.037,-22.331
  Bottom Layer w0.254: R24_cdh1.1@22.012,-23.314 ccw(c21.145,-22.446) 22.371,-22.446 ccw(c23.597,-22.446) R24_cdh1.1@22.73,-23.314 ; R26_cdh1.2@22.044,-21.623 cw(c21.451,-22.327) 22.371,-22.327 ; R24_cdh1.1@22.371,-24.003 22.371,-22.327 ; R26_cdh1.2@22.371,-21.107 22.371,-22.327 ; R26_cdh1.2@22.698,-21.623 ccw(c23.291,-22.327) 22.371,-22.327 ; v1@23.863,-22.505 ccw(c23.653,-22.715) 23.653,-22.418 ccw(c23.653,-22.121) v1@23.863,-22.331 ; v1(23.95,-22.418) 22.462,-22.418 22.371,-22.327
NetR24_cdh2_1: R24_cdh2.1 R26_cdh2.2 U19_cdh2.10 | length 12.4
  Top Layer w0.254: U19_cdh2.10@49.739,-21.173 51.661,-21.173 51.915,-21.427 ; U19_cdh2.10@50.358,-21.242 cw(c50.525,-21.41) 50.525,-21.173 cw(c50.525,-20.937) U19_cdh2.10@50.358,-21.104 ; v1@51.701,-22.204 ccw(c51.491,-21.994) 51.788,-21.994 ccw(c52.085,-21.994) v1@51.875,-22.204 ; v1(51.788,-22.291) 51.788,-21.402
  Bottom Layer w0.254: R24_cdh2.1@49.977,-23.212 ccw(c49.11,-22.345) 50.336,-22.345 ccw(c51.563,-22.345) R24_cdh2.1@50.696,-23.212 ; R26_cdh2.2@50.009,-21.521 cw(c49.416,-22.225) 50.336,-22.225 ; R24_cdh2.1@50.336,-23.901 50.336,-22.225 ; R26_cdh2.2@50.336,-21.006 50.336,-22.225 ; R26_cdh2.2@50.664,-21.521 ccw(c51.256,-22.225) 50.336,-22.225 ; 51.43,-22.316 ccw(c51.43,-21.933) v1@51.701,-22.204 ; v1@51.915,-22.316 50.428,-22.316 50.336,-22.225
NetR24_cdh3_1: R24_cdh3.1 R26_cdh3.2 U19_cdh3.10 | length 12.5
  Top Layer w0.254: U19_cdh3.10@60.838,-21.173 62.761,-21.173 63.015,-21.427 v1(63.015,-22.316) ; U19_cdh3.10@61.458,-21.242 cw(c61.625,-21.41) 61.625,-21.173 cw(c61.625,-20.937) U19_cdh3.10@61.458,-21.104 ; v1@62.928,-22.229 ccw(c62.718,-22.019) 63.015,-22.019 ccw(c63.312,-22.019) v1@63.102,-22.229
  Bottom Layer w0.254: R24_cdh3.1@61.077,-23.212 ccw(c60.21,-22.345) 61.436,-22.345 ccw(c62.663,-22.345) R24_cdh3.1@61.795,-23.212 ; R26_cdh3.2@61.109,-21.521 cw(c60.516,-22.225) 61.436,-22.225 ; R24_cdh3.1@61.436,-23.901 61.436,-22.225 ; R26_cdh3.2@61.436,-21.006 61.436,-22.225 ; R26_cdh3.2@61.763,-21.521 ccw(c62.356,-22.225) 61.436,-22.225 ; v1@62.928,-22.403 ccw(c62.718,-22.613) 62.718,-22.316 ccw(c62.718,-22.019) v1@62.928,-22.229 ; v1(63.015,-22.316) 61.527,-22.316 61.436,-22.225
NetR24_cdh4_1: R24_cdh4.1 R26_cdh4.2 U19_cdh4.10 | length 12.5
  Top Layer w0.254: U19_cdh4.10@71.684,-21.173 73.607,-21.173 73.861,-21.427 v1(73.861,-22.316) ; U19_cdh4.10@72.303,-21.242 cw(c72.471,-21.41) 72.471,-21.173 cw(c72.471,-20.937) U19_cdh4.10@72.303,-21.104 ; v1@73.774,-22.229 ccw(c73.564,-22.019) 73.861,-22.019 ccw(c74.158,-22.019) v1@73.948,-22.229
  Bottom Layer w0.254: R24_cdh4.1@71.923,-23.212 ccw(c71.056,-22.345) 72.282,-22.345 ccw(c73.508,-22.345) R24_cdh4.1@72.641,-23.212 ; R26_cdh4.2@71.955,-21.521 cw(c71.362,-22.225) 72.282,-22.225 ; R24_cdh4.1@72.282,-23.901 72.282,-22.225 ; R26_cdh4.2@72.282,-21.006 72.282,-22.225 ; R26_cdh4.2@72.609,-21.521 ccw(c73.202,-22.225) 72.282,-22.225 ; v1@73.774,-22.403 ccw(c73.564,-22.613) 73.564,-22.316 ccw(c73.564,-22.019) v1@73.774,-22.229 ; v1(73.861,-22.316) 72.373,-22.316 72.282,-22.225
NetR24_cdh5_1: R24_cdh5.1 R26_cdh5.2 U19_cdh5.10 | length 12.5
  Top Layer w0.254: U19_cdh5.10@82.555,-21.173 84.478,-21.173 84.732,-21.427 v1(84.732,-22.316) ; U19_cdh5.10@83.175,-21.242 cw(c83.342,-21.41) 83.342,-21.173 cw(c83.342,-20.937) U19_cdh5.10@83.175,-21.104 ; v1@84.645,-22.229 ccw(c84.435,-22.019) 84.732,-22.019 ccw(c85.029,-22.019) v1@84.819,-22.229
  Bottom Layer w0.254: R24_cdh5.1@82.794,-23.212 ccw(c81.927,-22.345) 83.153,-22.345 ccw(c84.38,-22.345) R24_cdh5.1@83.512,-23.212 ; R26_cdh5.2@82.826,-21.521 cw(c82.233,-22.225) 83.153,-22.225 ; R24_cdh5.1@83.153,-23.901 83.153,-22.225 ; R26_cdh5.2@83.153,-21.006 83.153,-22.225 ; R26_cdh5.2@83.48,-21.521 ccw(c84.073,-22.225) 83.153,-22.225 ; v1@84.645,-22.403 ccw(c84.435,-22.613) 84.435,-22.316 ccw(c84.435,-22.019) v1@84.645,-22.229 ; v1(84.732,-22.316) 83.244,-22.316 83.153,-22.225
NetR24_cdh6_1: R24_cdh6.1 R26_cdh6.2 U19_cdh6.10 | length 12.5
  Top Layer w0.254: U19_cdh6.10@93.376,-21.173 95.299,-21.173 95.553,-21.427 v1(95.553,-22.316) ; U19_cdh6.10@93.995,-21.242 cw(c94.162,-21.41) 94.162,-21.173 cw(c94.162,-20.937) U19_cdh6.10@93.995,-21.104 ; v1@95.466,-22.229 ccw(c95.256,-22.019) 95.553,-22.019 ccw(c95.85,-22.019) v1@95.64,-22.229
  Bottom Layer w0.254: R24_cdh6.1@93.614,-23.212 ccw(c92.747,-22.345) 93.974,-22.345 ccw(c95.2,-22.345) R24_cdh6.1@94.333,-23.212 ; R26_cdh6.2@93.646,-21.521 cw(c93.054,-22.225) 93.974,-22.225 ; R24_cdh6.1@93.974,-23.901 93.974,-22.225 ; R26_cdh6.2@93.974,-21.006 93.974,-22.225 ; R26_cdh6.2@94.301,-21.521 ccw(c94.894,-22.225) 93.974,-22.225 ; v1@95.466,-22.403 ccw(c95.256,-22.613) 95.256,-22.316 ccw(c95.256,-22.019) v1@95.466,-22.229 ; v1(95.553,-22.316) 94.065,-22.316 93.974,-22.225
NetR24_cdh7_1: R24_cdh7.1 R26_cdh7.2 U19_cdh7.10 | length 12.5
  Top Layer w0.254: U19_cdh7.10@104.45,-21.173 106.373,-21.173 106.627,-21.427 v1(106.627,-22.316) ; U19_cdh7.10@105.069,-21.242 cw(c105.237,-21.41) 105.237,-21.173 cw(c105.237,-20.937) U19_cdh7.10@105.069,-21.104 ; v1@106.54,-22.229 ccw(c106.33,-22.019) 106.627,-22.019 ccw(c106.924,-22.019) v1@106.714,-22.229
  Bottom Layer w0.254: R24_cdh7.1@104.689,-23.212 ccw(c103.822,-22.345) 105.048,-22.345 ccw(c106.274,-22.345) R24_cdh7.1@105.407,-23.212 ; R26_cdh7.2@104.721,-21.521 cw(c104.128,-22.225) 105.048,-22.225 ; R24_cdh7.1@105.048,-23.901 105.048,-22.225 ; R26_cdh7.2@105.048,-21.006 105.048,-22.225 ; R26_cdh7.2@105.375,-21.521 ccw(c105.968,-22.225) 105.048,-22.225 ; v1@106.54,-22.403 ccw(c106.33,-22.613) 106.33,-22.316 ccw(c106.33,-22.019) v1@106.54,-22.229 ; v1(106.627,-22.316) 105.139,-22.316 105.048,-22.225
NetR24_cdh8_1: R24_cdh8.1 R26_cdh8.2 U19_cdh8.10 | length 12.5
  Top Layer w0.254: U19_cdh8.10@123.17,-21.173 125.093,-21.173 125.347,-21.427 v1(125.347,-22.316) ; U19_cdh8.10@123.789,-21.242 cw(c123.957,-21.41) 123.957,-21.173 cw(c123.957,-20.937) U19_cdh8.10@123.789,-21.104 ; v1@125.26,-22.229 ccw(c125.05,-22.019) 125.347,-22.019 ccw(c125.644,-22.019) v1@125.434,-22.229
  Bottom Layer w0.254: R24_cdh8.1@123.409,-23.212 ccw(c122.541,-22.345) 123.768,-22.345 ccw(c124.994,-22.345) R24_cdh8.1@124.127,-23.212 ; R26_cdh8.2@123.441,-21.521 cw(c122.848,-22.225) 123.768,-22.225 ; R24_cdh8.1@123.768,-23.901 123.768,-22.225 ; R26_cdh8.2@123.768,-21.006 123.768,-22.225 ; R26_cdh8.2@124.095,-21.521 ccw(c124.688,-22.225) 123.768,-22.225 ; v1@125.26,-22.403 ccw(c125.05,-22.613) 125.05,-22.316 ccw(c125.05,-22.019) v1@125.26,-22.229 ; v1(125.347,-22.316) 123.859,-22.316 123.768,-22.225
VCC8: C2_cdh1.2 C2_cdh2.2 C2_cdh3.2 C2_cdh4.2 C2_cdh5.2 C2_cdh6.2 C2_cdh7.2 C2_cdh8.2 C4.1 C5.2 R24_cdh1.2 R24_cdh2.2 R24_cdh3.2 R24_cdh4.2 R24_cdh5.2 R24_cdh6.2 R24_cdh7.2 R24_cdh8.2 U1.3 U3_cdh1.1 U3_cdh2.1 U3_cdh3.1 U3_cdh4.1 U3_cdh5.1 U3_cdh6.1 U3_cdh7.1 U3_cdh8.1 U19_cdh1.4 U19_cdh2.4 U19_cdh3.4 U19_cdh4.4 U19_cdh5.4 U19_cdh6.4 U19_cdh7.4 U19_cdh8.4 | length 322
  Top Layer w0.254: U19_cdh1.4@16.023,-20.625 17.814,-20.625 18.159,-20.97 18.159,-24.221 v1(18.072,-24.308) U3_cdh1.1@16.485,-24.308 ; U19_cdh1.4@16.642,-20.694 cw(c16.81,-20.861) 16.81,-20.625 cw(c16.81,-20.388) U19_cdh1.4@16.642,-20.556 ; U3_cdh1.1@17.307,-24.469 cw(c17.697,-24.86) 17.697,-24.308 cw(c17.697,-23.756) U3_cdh1.1@17.307,-24.146 ; v1@17.985,-24.395 ccw(c17.775,-24.605) 17.775,-24.308 ccw(c17.775,-24.011) 17.985,-24.221 ccw(c17.566,-23.802) 18.159,-23.802 ; U19_cdh2.4@43.989,-20.523 45.779,-20.523 46.124,-20.868 46.124,-24.12 v1(46.038,-24.206) U3_cdh2.1@44.451,-24.206 ; U19_cdh2.4@44.608,-20.592 cw(c44.775,-20.76) 44.775,-20.523 cw(c44.775,-20.287) U19_cdh2.4@44.608,-20.454 ; U3_cdh2.1@45.273,-24.368 cw(c45.663,-24.758) 45.663,-24.206 cw(c45.663,-23.654) U3_cdh2.1@45.273,-24.045 ; v1@45.951,-24.293 ccw(c45.741,-24.503) 45.741,-24.206 ccw(c45.741,-23.909) 45.951,-24.119 ccw(c45.532,-23.7) 46.124,-23.7 ; U19_cdh3.4@55.088,-20.523 56.879,-20.523 57.224,-20.868 57.224,-24.12 v1(57.137,-24.206) U3_cdh3.1@55.55,-24.206 ; U19_cdh3.4@55.708,-20.592 cw(c55.875,-20.76) 55.875,-20.523 cw(c55.875,-20.287) U19_cdh3.4@55.708,-20.454 ; U3_cdh3.1@56.372,-24.368 cw(c56.763,-24.758) 56.763,-24.206 cw(c56.763,-23.654) U3_cdh3.1@56.372,-24.045 ; v1@57.05,-24.293 ccw(c56.84,-24.503) 56.84,-24.206 ccw(c56.84,-23.909) 57.05,-24.119 ccw(c56.631,-23.7) 57.224,-23.7 ; U19_cdh4.4@65.934,-20.523 67.725,-20.523 68.07,-20.868 68.07,-24.12 v1(67.983,-24.206) U3_cdh4.1@66.396,-24.206 ; U19_cdh4.4@66.553,-20.592 cw(c66.721,-20.76) 66.721,-20.523 cw(c66.721,-20.287) U19_cdh4.4@66.553,-20.454 ; U3_cdh4.1@67.218,-24.368 cw(c67.608,-24.758) 67.608,-24.206 cw(c67.608,-23.654) U3_cdh4.1@67.218,-24.045 ; v1@67.896,-24.293 ccw(c67.686,-24.503) 67.686,-24.206 ccw(c67.686,-23.909) 67.896,-24.119 ccw(c67.477,-23.7) 68.07,-23.7 ; U19_cdh5.4@76.805,-20.523 78.596,-20.523 78.941,-20.868 78.941,-24.12 v1(78.854,-24.206) U3_cdh5.1@77.267,-24.206 ; U19_cdh5.4@77.425,-20.592 cw(c77.592,-20.76) 77.592,-20.523 cw(c77.592,-20.287) U19_cdh5.4@77.425,-20.454 ; U3_cdh5.1@78.089,-24.368 cw(c78.48,-24.758) 78.48,-24.206 cw(c78.48,-23.654) U3_cdh5.1@78.089,-24.045 ; v1@78.767,-24.293 ccw(c78.557,-24.503) 78.557,-24.206 ccw(c78.557,-23.909) 78.767,-24.119 ccw(c78.348,-23.7) 78.941,-23.7 ; U19_cdh6.4@87.626,-20.523 89.416,-20.523 89.761,-20.868 89.761,-24.12 v1(89.675,-24.206) U3_cdh6.1@88.088,-24.206 ; U19_cdh6.4@88.245,-20.592 cw(c88.412,-20.76) 88.412,-20.523 cw(c88.412,-20.287) U19_cdh6.4@88.245,-20.454 ; U3_cdh6.1@88.91,-24.368 cw(c89.3,-24.758) 89.3,-24.206 cw(c89.3,-23.654) U3_cdh6.1@88.91,-24.045 ; v1@89.588,-24.293 ccw(c89.378,-24.503) 89.378,-24.206 ccw(c89.378,-23.909) 89.588,-24.119 ccw(c89.169,-23.7) 89.761,-23.7 ; U19_cdh7.4@98.7,-20.523 100.491,-20.523 100.836,-20.868 100.836,-24.12 v1(100.749,-24.206) U3_cdh7.1@99.162,-24.206 ; U19_cdh7.4@99.319,-20.592 cw(c99.487,-20.76) 99.487,-20.523 cw(c99.487,-20.287) U19_cdh7.4@99.319,-20.454 ; U3_cdh7.1@99.984,-24.368 cw(c100.374,-24.758) 100.374,-24.206 cw(c100.374,-23.654) U3_cdh7.1@99.984,-24.045 ; v1@100.662,-24.293 ccw(c100.452,-24.503) 100.452,-24.206 ccw(c100.452,-23.909) 100.662,-24.119 ccw(c100.243,-23.7) 100.836,-23.7 ; U19_cdh8.4@117.42,-20.523 119.21,-20.523 119.556,-20.868 119.556,-24.12 v1(119.469,-24.206) U3_cdh8.1@117.882,-24.206 ; U19_cdh8.4@118.039,-20.592 cw(c118.207,-20.76) 118.207,-20.523 cw(c118.207,-20.287) U19_cdh8.4@118.039,-20.454 ; U3_cdh8.1@118.704,-24.368 cw(c119.094,-24.758) 119.094,-24.206 cw(c119.094,-23.654) U3_cdh8.1@118.704,-24.045 ; v1@119.382,-24.293 ccw(c119.172,-24.503) 119.172,-24.206 ccw(c119.172,-23.909) 119.382,-24.119 ccw(c118.963,-23.7) 119.556,-23.7
  Bottom Layer w0.254: C2_cdh1.2@16.199,-25.742 ccw(c15.332,-24.874) 16.559,-24.874 ccw(c17.785,-24.874) C2_cdh1.2@16.918,-25.742 ; C2_cdh1.2@16.559,-26.101 16.559,-24.755 17.005,-24.308 v1(18.072,-24.308) ; v1@17.985,-24.395 ccw(c17.775,-24.605) 17.775,-24.308 ccw(c17.775,-24.011) v1@17.985,-24.221 ; C2_cdh2.2@44.165,-25.64 ccw(c43.298,-24.773) 44.524,-24.773 ccw(c45.75,-24.773) C2_cdh2.2@44.883,-25.64 ; C2_cdh2.2@44.524,-25.999 44.524,-24.653 44.971,-24.206 v1(46.038,-24.206) ; v1@45.951,-24.293 ccw(c45.741,-24.503) 45.741,-24.206 ccw(c45.741,-23.909) v1@45.951,-24.119 ; C2_cdh3.2@55.265,-25.64 ccw(c54.397,-24.773) 55.624,-24.773 ccw(c56.85,-24.773) C2_cdh3.2@55.983,-25.64 ; C2_cdh3.2@55.624,-25.999 55.624,-24.653 56.071,-24.206 v1(57.137,-24.206) ; v1@57.05,-24.293 ccw(c56.84,-24.503) 56.84,-24.206 ccw(c56.84,-23.909) v1@57.05,-24.119 ; C2_cdh4.2@66.11,-25.64 ccw(c65.243,-24.773) 66.47,-24.773 ccw(c67.696,-24.773) C2_cdh4.2@66.829,-25.64 ; C2_cdh4.2@66.47,-25.999 66.47,-24.653 66.916,-24.206 v1(67.983,-24.206) ; v1@67.896,-24.293 ccw(c67.686,-24.503) 67.686,-24.206 ccw(c67.686,-23.909) v1@67.896,-24.119 ; C2_cdh5.2@76.982,-25.64 ccw(c76.114,-24.773) 77.341,-24.773 ccw(c78.567,-24.773) C2_cdh5.2@77.7,-25.64 ; C2_cdh5.2@77.341,-25.999 77.341,-24.653 77.788,-24.206 v1(78.854,-24.206) ; v1@78.767,-24.293 ccw(c78.557,-24.503) 78.557,-24.206 ccw(c78.557,-23.909) v1@78.767,-24.119 ; C2_cdh6.2@87.802,-25.64 ccw(c86.935,-24.773) 88.161,-24.773 ccw(c89.388,-24.773) C2_cdh6.2@88.52,-25.64 ; C2_cdh6.2@88.161,-25.999 88.161,-24.653 88.608,-24.206 v1(89.675,-24.206) ; v1@89.588,-24.293 ccw(c89.378,-24.503) 89.378,-24.206 ccw(c89.378,-23.909) v1@89.588,-24.119 ; C2_cdh7.2@98.876,-25.64 ccw(c98.009,-24.773) 99.236,-24.773 ccw(c100.462,-24.773) C2_cdh7.2@99.595,-25.64 ; C2_cdh7.2@99.236,-25.999 99.236,-24.653 99.682,-24.206 v1(100.749,-24.206) ; v1@100.662,-24.293 ccw(c100.452,-24.503) 100.452,-24.206 ccw(c100.452,-23.909) v1@100.662,-24.119 ; C2_cdh8.2@117.596,-25.64 ccw(c116.729,-24.773) 117.955,-24.773 ccw(c119.182,-24.773) C2_cdh8.2@118.315,-25.64 ; C2_cdh8.2@117.955,-25.999 117.955,-24.653 118.402,-24.206 v1(119.469,-24.206) ; v1@119.382,-24.293 ccw(c119.172,-24.503) 119.172,-24.206 ccw(c119.172,-23.909) v1@119.382,-24.119
  Bottom Layer w0.762: C4.1@13.008,-18.761 ccw(c12.358,-19.411) 12.358,-18.491 ccw(c12.358,-17.571) C4.1@13.008,-18.222 ; C4.1@13.278,-18.491 11.068,-18.491 10.509,-19.05 10.509,-24.917 11.693,-26.101 C2_cdh1.2@16.559,-26.101 16.885,-26.427 120.87,-26.427 121.313,-25.984 R24_cdh8.2@123.768,-25.984 126.486,-25.984 ; C2_cdh1.2@16.738,-25.921 ccw(c17.959,-24.7) 17.959,-26.427 ; 21.241,-26.427 ccw(c21.241,-25.082) R24_cdh1.2@22.191,-26.033 ; R24_cdh1.2@22.551,-26.033 ccw(c23.501,-25.082) 23.501,-26.427 ; 42.878,-26.427 ccw(c42.878,-24.353) C2_cdh2.2@44.344,-25.82 ; C2_cdh2.2@44.704,-25.82 ccw(c46.17,-24.353) 46.17,-26.427 ; 48.961,-26.427 ccw(c48.961,-24.736) R24_cdh2.2@50.157,-25.932 ; R24_cdh2.2@50.516,-25.932 ccw(c51.712,-24.736) 51.712,-26.427 ; 53.978,-26.427 ccw(c53.978,-24.353) C2_cdh3.2@55.444,-25.82 ; C2_cdh3.2@55.803,-25.82 ccw(c57.27,-24.353) 57.27,-26.427 ; 60.061,-26.427 ccw(c60.061,-24.736) R24_cdh3.2@61.257,-25.932 ; R24_cdh3.2@61.616,-25.932 ccw(c62.812,-24.736) 62.812,-26.427 ; 64.824,-26.427 ccw(c64.824,-24.353) C2_cdh4.2@66.29,-25.82 ; C2_cdh4.2@66.649,-25.82 ccw(c68.116,-24.353) 68.116,-26.427 ; 70.906,-26.427 ccw(c70.906,-24.736) R24_cdh4.2@72.102,-25.932 ; R24_cdh4.2@72.462,-25.932 ccw(c73.658,-24.736) 73.658,-26.427 ; 75.695,-26.427 ccw(c75.695,-24.353) C2_cdh5.2@77.161,-25.82 ; C2_cdh5.2@77.52,-25.82 ccw(c78.987,-24.353) 78.987,-26.427 ; 81.778,-26.427 ccw(c81.778,-24.736) R24_cdh5.2@82.974,-25.932 ; R24_cdh5.2@83.333,-25.932 ccw(c84.529,-24.736) 84.529,-26.427 ; 86.515,-26.427 ccw(c86.515,-24.353) C2_cdh6.2@87.982,-25.82 ; C2_cdh6.2@88.341,-25.82 ccw(c89.807,-24.353) 89.807,-26.427 ; 92.598,-26.427 ccw(c92.598,-24.736) R24_cdh6.2@93.794,-25.932 ; R24_cdh6.2@94.153,-25.932 ccw(c95.349,-24.736) 95.349,-26.427 ; 97.59,-26.427 ccw(c97.59,-24.353) C2_cdh7.2@99.056,-25.82 ; C2_cdh7.2@99.415,-25.82 ccw(c100.882,-24.353) 100.882,-26.427 ; 103.672,-26.427 ccw(c103.672,-24.736) R24_cdh7.2@104.868,-25.932 ; R24_cdh7.2@105.228,-25.932 ccw(c106.424,-24.736) 106.424,-26.427 ; 116.309,-26.427 ccw(c116.309,-24.353) C2_cdh8.2@117.776,-25.82 ; C2_cdh8.2@118.135,-25.82 ccw(c119.601,-24.353) 119.601,-26.427 ; C5.2@128.619,-25.984 126.486,-25.984 ; U1.3@135.714,-8.901 ccw(c134.999,-8.186) 136.011,-8.186 ccw(c137.022,-8.186) U1.3@136.307,-8.901 ; U1.3@136.011,-9.347 136.011,-7.671 135.172,-6.833 127.502,-6.833 126.435,-7.899 126.435,-25.933 126.486,-25.984
VCC24: D3.1 P1.10 | length 54.4
  Bottom Layer w0.762: P1.10@77.521,-0.965 cw(c77.814,-2.14) 78.671,-1.284 ; P1.10@77.616,-1.346 78.734,-1.346 79.623,-2.235 ; P1.10@77.706,-1.704 cw(c78.195,-3.663) 79.623,-2.235 ; P1.10@77.877,-1.607 cw(c78.507,-2.237) 78.507,-1.346 cw(c78.507,-0.455) P1.10@77.877,-1.085 ; D3.1@126.892,-2.235 79.623,-2.235
pads on no net: U3_cdh1.5 U3_cdh1.6 U3_cdh1.7 U3_cdh1.8 U3_cdh2.5 U3_cdh2.6 U3_cdh2.7 U3_cdh2.8 U3_cdh3.5 U3_cdh3.6 U3_cdh3.7 U3_cdh3.8 U3_cdh4.5 U3_cdh4.6 U3_cdh4.7 U3_cdh4.8 U3_cdh5.5 U3_cdh5.6 U3_cdh5.7 U3_cdh5.8 U3_cdh6.5 U3_cdh6.6 U3_cdh6.7 U3_cdh6.8 U3_cdh7.5 U3_cdh7.6 U3_cdh7.7 U3_cdh7.8 U3_cdh8.5 U3_cdh8.6 U3_cdh8.7 U3_cdh8.8 U5_cdh9.1 U5_cdh9.2 U5_cdh9.3 U5_cdh9.4 U5_cdh10.1 U5_cdh10.2 U5_cdh10.3 U5_cdh10.4 U5_cdh11.1 U5_cdh11.2 U5_cdh11.3 U5_cdh11.4 U5_cdh12.1 U5_cdh12.2 U5_cdh12.3 U5_cdh12.4 U5_cdh13.1 U5_cdh13.2 U5_cdh13.3 U5_cdh13.4 U5_cdh14.1 U5_cdh14.2 U5_cdh14.3 U5_cdh14.4 U5_cdh15.1 U5_cdh15.2 U5_cdh15.3 U5_cdh15.4 U5_cdh16.1 U5_cdh16.2 U5_cdh16.3 U5_cdh16.4
copper on no net:
  other v2: 34.4,-22.588 111.398,-22.584 138.551,-22.347

## Keep-outs
Keep-Out Layer:
  the board outline again, w0.254

## Other copper
Bottom Layer:
  region net GND: 2.864,-16.18 8.763,-16.18 8.763,-28.397 8.753,-28.387 4.758,-28.387 2.864,-26.492
  region net GND: 131.108,-11.024 131.896,-11.811 137.89,-11.811 138.551,-11.151 135.509,-11.887 135.509,-28.727 134.442,-28.727 130.023,-28.753 129.972,-28.702 131.1,-27.574 131.108,-27.574

## Silkscreen, mask and mechanical layers (free items; w line width, h text height)
Top Overlay:
  circle w0.1: c81.872,-3.937 r0.475
  circle w0.1: c81.821,-1.372 r0.475
  circle w0.254: c34.4,-22.588 r3
  circle w0.254: c111.398,-22.584 r3
  rectangle: 1.092,-29.362 2.769,-27.788
  lines w0.1: 81.636,-1.397 82.042,-1.397 ; 81.661,-3.937 82.144,-3.937 ; 81.839,-1.651 81.839,-1.143
  lines w0.2: 71.476,-6.096 71.476,-5.588 73.66,-5.588 73.66,-6.045 73.635,-6.071
  lines w0.254: 31.548,-22.588 34.4,-22.588 ; 34.4,-25.512 34.4,-22.588 ; 34.4,-19.67 34.4,-22.588 ; 37.4,-22.588 34.4,-22.588 ; 57.456,-0.001 57.456,-1.346 57.456,-6.071 87.616,-6.071 ; 87.616,-6.031 87.616,-1.346 87.616,-0.014 ; 108.506,-22.584 111.398,-22.584 ; 111.398,-25.476 111.398,-22.584 ; 111.398,-19.634 111.398,-22.584 ; 114.398,-22.584 111.398,-22.584
  text "CDH01" at 4.47,-25.654 h0.7
  text "VER:161014" at 2.743,-27 h0.7

## Text inside footprints (layer, text, board x,y; h text height)
P1: Top Overlay "2" at 64.916,-1.854 h1; Top Overlay "1" at 65.424,-4.394 h1; Top Overlay "9" at 79.14,-4.394 h1; Top Overlay "10" at 79.14,-1.854 h1
Q2_cdh1: Top Overlay "B" at 36.468,-13.665 h0.7; Top Overlay "E" at 37.992,-13.665 h0.7
Q2_cdh2: Top Overlay "B" at 26.435,-13.665 h0.7; Top Overlay "E" at 27.959,-13.665 h0.7
Q2_cdh3: Bottom Overlay "B" at 7.766,-11.125 h0.7; Bottom Overlay "E" at 6.242,-11.125 h0.7
Q2_cdh4: Bottom Overlay "B" at 7.766,-4.013 h0.7; Bottom Overlay "E" at 6.242,-4.013 h0.7
Q2_cdh5: Top Overlay "B" at 26.435,-20.269 h0.7; Top Overlay "E" at 27.959,-20.269 h0.7
Q2_cdh6: Top Overlay "B" at 112.312,-4.75 h0.7; Top Overlay "E" at 113.836,-4.75 h0.7
Q2_cdh7: Top Overlay "B" at 117.85,-4.775 h0.7; Top Overlay "E" at 119.374,-4.775 h0.7
Q2_cdh8: Top Overlay "B" at 112.414,-13.157 h0.7; Top Overlay "E" at 113.938,-13.157 h0.7